# EAGLE board Atomic_V1.0__P-CAD-ASCII.PCB_DipTrace-Export (EAGLE 7.7.0)
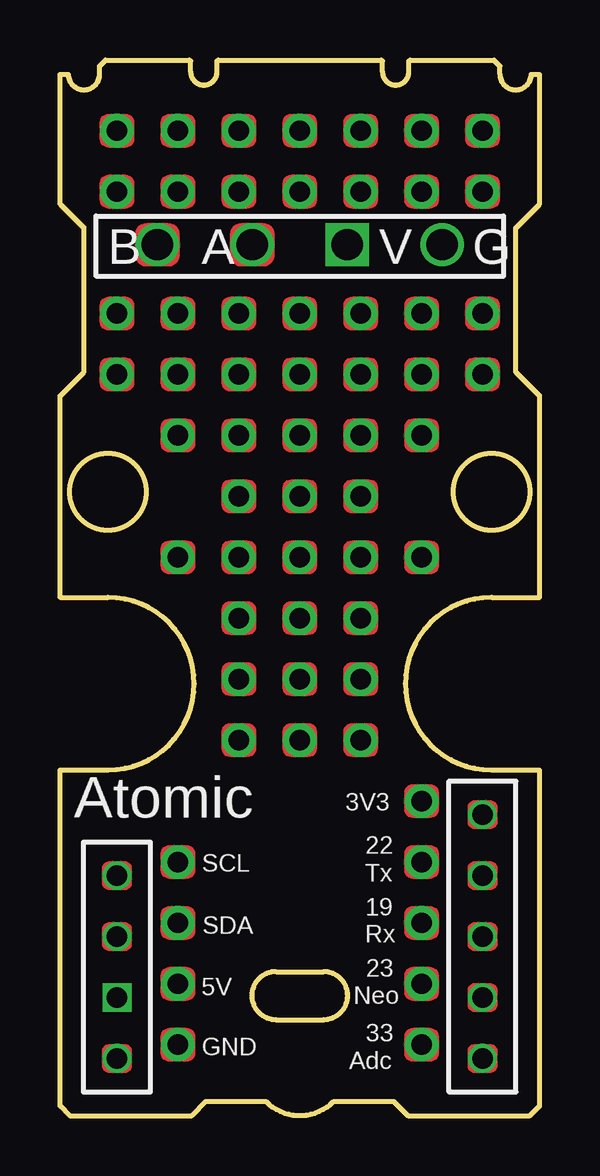
[diagram p0: board, top side]
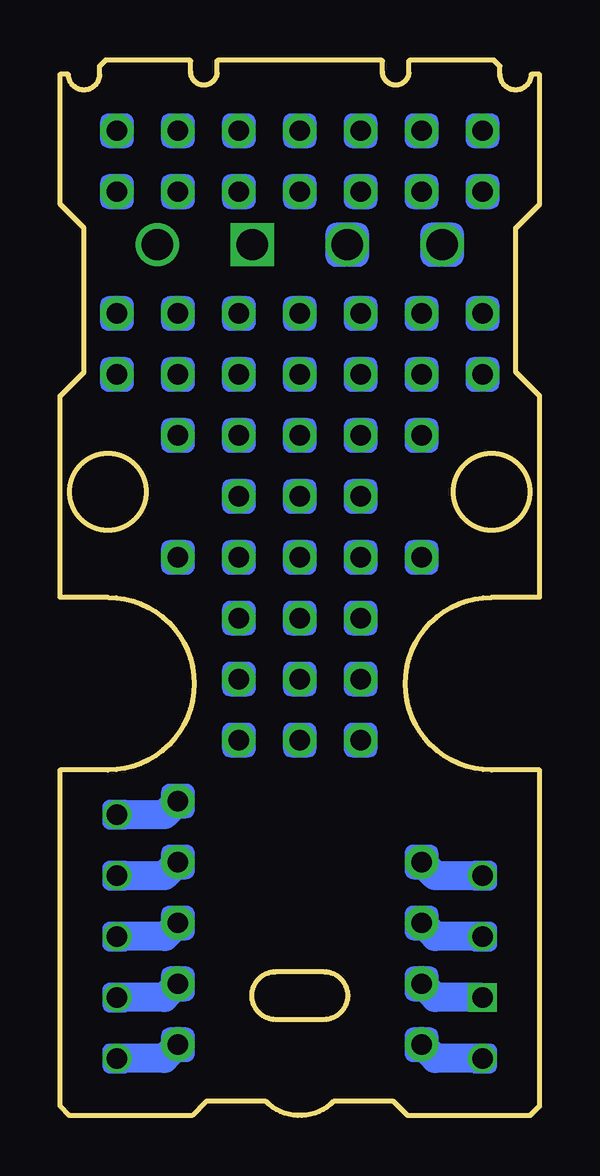
[diagram p1: board, bottom side, seen from below]

Size 20 x 44 mm. Coordinates in mm from the lower left corner, seen from the top.
Outline: 0.35,43.4 arc180 1.65,43.4 1.65,43.75 1.9,44 5.4,44 5.45,43.95 5.45,43.5 arc180 6.55,43.5 6.55,43.95 6.6,44 13.4,44 13.45,43.95 13.45,43.5 arc180 14.55,43.5 14.55,43.95 14.6,44 18.1,44 18.35,43.75 18.35,43.4 arc180 19.65,43.4 20,43.4 20,38 19,37 19,31 20,30 20,21.6 18,21.6 arc180 18,14.4 20,14.4 20,0.4 19.6,0 14.5,0 13.91,0.59 11.41,0.59 arc-90 8.59,0.59 6.09,0.59 5.5,0 0.4,0 0,0.4 0,14.4 2,14.4 arc180 2,21.6 0,21.6 0,30 1,31 1,37 0,38 0,43.4 0.35,43.4
Outline: 11,4 arc180 11,6 9,6 arc180 9,4 11,4
Outline: circle at 2,26 radius 1.6
Outline: circle at 18,26 radius 1.6
Copper layers (1*16): TOP 0.035mm / dielectric 1.5mm / Bottom 0.035mm
Design rules "default *": minimum track width 10mil, minimum drill 0.61mm, track to track 8mil, track to pad 8mil, pad to pad 8mil, via to via 8mil, smd to smd 8mil, copper to edge 40mil, drill to drill 8mil, minimum pad ring 0mil, minimum via ring 8mil, stop-mask expansion 2mil, vias tented up to drill 19mil, thermal gap 10mil
Net classes: 0 Default: width 0.33 mm, clearance 0.33 mm

## Footprints (pad centres in the part's own frame; a part is rotated, then mirrored left to right if it is on the bottom)
FREEPAD = drill 4.2 pad 4.2: 1 0,0
FREEPAD_FREEPAD1 = drill 0.85 pad 1.4: 1 0,0
FREEPAD_FREEPAD10 = drill 2 pad 2: 1 0,0
FREEPAD_FREEPAD11 = drill 0.85 pad 1.2: 1 0,0
FREEPAD_FREEPAD18 = drill 0.85 pad 1.2 square: 1 0,0
FREEPAD_FREEPAD66 = drill 1.3 pad 1.8: 1 0,0
FREEPAD_FREEPAD67 = drill 1.3 pad 1.8: 1 0,0
FREEPAD_FREEPAD69 = drill 1.3 pad 1.8 square: 1 0,0
FREEPAD_FREEPAD74 = drill 0: 1 0,0

## Placement (x,y rotation side)
FREEPAD0  FREEPAD  [FREEPAD]  10,10 0 top
FREEPAD1  FREEPAD  [FREEPAD_FREEPAD1]  4.92,2.95 180 top
FREEPAD2  FREEPAD  [FREEPAD_FREEPAD1]  15.08,2.95 180 top
FREEPAD3  FREEPAD  [FREEPAD_FREEPAD1]  4.92,5.49 180 top
FREEPAD4  FREEPAD  [FREEPAD_FREEPAD1]  15.08,5.49 180 top
FREEPAD5  FREEPAD  [FREEPAD_FREEPAD1]  4.92,8.03 180 top
FREEPAD6  FREEPAD  [FREEPAD_FREEPAD1]  15.08,8.03 180 top
FREEPAD7  FREEPAD  [FREEPAD_FREEPAD1]  4.92,10.57 180 top
FREEPAD8  FREEPAD  [FREEPAD_FREEPAD1]  15.08,10.57 180 top
FREEPAD9  FREEPAD  [FREEPAD_FREEPAD1]  15.08,13.11 180 top
FREEPAD10  FREEPAD  [FREEPAD_FREEPAD10]  10,2 0 top
FREEPAD11  FREEPAD  [FREEPAD_FREEPAD11]  2.38,10 180 top
FREEPAD12  FREEPAD  [FREEPAD_FREEPAD11]  2.38,7.46 180 top
FREEPAD13  FREEPAD  [FREEPAD_FREEPAD11]  17.62,2.38 0 top
FREEPAD14  FREEPAD  [FREEPAD_FREEPAD11]  17.62,4.92 0 top
FREEPAD15  FREEPAD  [FREEPAD_FREEPAD11]  17.62,7.46 0 top
FREEPAD16  FREEPAD  [FREEPAD_FREEPAD11]  17.62,10 0 top
FREEPAD17  FREEPAD  [FREEPAD_FREEPAD11]  17.62,12.54 0 top
FREEPAD18  FREEPAD  [FREEPAD_FREEPAD18]  2.38,4.92 180 top
FREEPAD19  FREEPAD  [FREEPAD_FREEPAD11]  2.38,2.38 180 top
FREEPAD20  FREEPAD  [FREEPAD_FREEPAD1]  7.46,20.73 180 top
FREEPAD21  FREEPAD  [FREEPAD_FREEPAD1]  7.46,18.19 180 top
FREEPAD22  FREEPAD  [FREEPAD_FREEPAD1]  7.46,15.65 0 top
FREEPAD23  FREEPAD  [FREEPAD_FREEPAD1]  4.92,38.51 0 top
FREEPAD24  FREEPAD  [FREEPAD_FREEPAD1]  2.38,38.51 0 top
FREEPAD25  FREEPAD  [FREEPAD_FREEPAD1]  10,15.65 180 top
FREEPAD26  FREEPAD  [FREEPAD_FREEPAD1]  10,38.51 0 top
FREEPAD27  FREEPAD  [FREEPAD_FREEPAD1]  7.46,38.51 0 top
FREEPAD28  FREEPAD  [FREEPAD_FREEPAD1]  10,33.43 0 top
FREEPAD29  FREEPAD  [FREEPAD_FREEPAD1]  7.46,33.43 0 top
FREEPAD30  FREEPAD  [FREEPAD_FREEPAD1]  4.92,33.43 0 top
FREEPAD31  FREEPAD  [FREEPAD_FREEPAD1]  2.38,33.43 0 top
FREEPAD32  FREEPAD  [FREEPAD_FREEPAD1]  10,30.89 0 top
FREEPAD33  FREEPAD  [FREEPAD_FREEPAD1]  7.46,30.89 0 top
FREEPAD34  FREEPAD  [FREEPAD_FREEPAD1]  4.92,30.89 0 top
FREEPAD35  FREEPAD  [FREEPAD_FREEPAD1]  2.38,30.89 0 top
FREEPAD36  FREEPAD  [FREEPAD_FREEPAD1]  10,28.35 0 top
FREEPAD37  FREEPAD  [FREEPAD_FREEPAD1]  7.46,28.35 0 top
FREEPAD38  FREEPAD  [FREEPAD_FREEPAD1]  10,25.81 0 top
FREEPAD39  FREEPAD  [FREEPAD_FREEPAD1]  7.46,25.81 0 top
FREEPAD40  FREEPAD  [FREEPAD_FREEPAD1]  10,23.27 0 top
FREEPAD41  FREEPAD  [FREEPAD_FREEPAD1]  7.46,23.27 0 top
FREEPAD42  FREEPAD  [FREEPAD_FREEPAD1]  10,18.19 0 top
FREEPAD43  FREEPAD  [FREEPAD_FREEPAD1]  10,20.73 0 top
FREEPAD44  FREEPAD  [FREEPAD_FREEPAD1]  7.46,41.05 0 top
FREEPAD45  FREEPAD  [FREEPAD_FREEPAD1]  10,41.05 0 top
FREEPAD46  FREEPAD  [FREEPAD_FREEPAD1]  2.38,41.05 0 top
FREEPAD47  FREEPAD  [FREEPAD_FREEPAD1]  4.92,41.05 0 top
FREEPAD48  FREEPAD  [FREEPAD_FREEPAD1]  12.54,23.27 180 top
FREEPAD49  FREEPAD  [FREEPAD_FREEPAD1]  12.54,25.81 180 top
FREEPAD50  FREEPAD  [FREEPAD_FREEPAD1]  12.54,28.35 180 top
FREEPAD51  FREEPAD  [FREEPAD_FREEPAD1]  17.62,30.89 180 top
FREEPAD52  FREEPAD  [FREEPAD_FREEPAD1]  15.08,30.89 180 top
FREEPAD53  FREEPAD  [FREEPAD_FREEPAD1]  12.54,30.89 180 top
FREEPAD54  FREEPAD  [FREEPAD_FREEPAD1]  17.62,33.43 180 top
FREEPAD55  FREEPAD  [FREEPAD_FREEPAD1]  15.08,33.43 180 top
FREEPAD56  FREEPAD  [FREEPAD_FREEPAD1]  12.54,33.43 180 top
FREEPAD57  FREEPAD  [FREEPAD_FREEPAD1]  12.54,38.51 180 top
FREEPAD58  FREEPAD  [FREEPAD_FREEPAD1]  17.62,38.51 180 top
FREEPAD59  FREEPAD  [FREEPAD_FREEPAD1]  15.08,38.51 180 top
FREEPAD60  FREEPAD  [FREEPAD_FREEPAD1]  12.54,15.65 180 top
FREEPAD61  FREEPAD  [FREEPAD_FREEPAD1]  12.54,18.19 0 top
FREEPAD62  FREEPAD  [FREEPAD_FREEPAD1]  12.54,20.73 0 top
FREEPAD63  FREEPAD  [FREEPAD_FREEPAD1]  15.08,41.05 180 top
FREEPAD64  FREEPAD  [FREEPAD_FREEPAD1]  17.62,41.05 180 top
FREEPAD65  FREEPAD  [FREEPAD_FREEPAD1]  12.54,41.05 180 top
FREEPAD66  FREEPAD  [FREEPAD_FREEPAD66]  15.94,36.3 270 top
FREEPAD67  FREEPAD  [FREEPAD_FREEPAD67]  4.06,36.3 270 top
FREEPAD68  FREEPAD  [FREEPAD_FREEPAD67]  8.02,36.3 270 top
FREEPAD69  FREEPAD  [FREEPAD_FREEPAD69]  11.98,36.3 270 top
FREEPAD70  FREEPAD  [FREEPAD_FREEPAD1]  4.92,28.35 0 top
FREEPAD71  FREEPAD  [FREEPAD_FREEPAD1]  15.08,28.35 0 top
FREEPAD72  FREEPAD  [FREEPAD_FREEPAD1]  4.92,23.27 0 top
FREEPAD73  FREEPAD  [FREEPAD_FREEPAD1]  15.08,23.27 180 top
FREEPAD74  FREEPAD  [FREEPAD_FREEPAD74]  10,2 0 top
FREEPAD75  FREEPAD  [FREEPAD_FREEPAD74]  10,2 180 top

## Library data of the parts
FREEPAD0 FREEPAD1-FREEPAD75 = common

## Tracks (layer width: path | path; a pad name or v marks a point on that pad's centre or on a via)
N$1
  Bottom 1.2: 15.08,13.11 15.65,12.54
N$2
  Bottom 1.2: 15.65,12.54 17.62,12.54
N$3
  Bottom 1.2: 15.08,10.57 15.65,10
N$4
  Bottom 1.2: 15.65,10 17.62,10
N$5
  Bottom 1.2: 15.08,8 15.62,7.46
N$6
  Bottom 1.2: 15.62,7.46 17.62,7.46
N$7
  Bottom 1.2: 15.08,5.49 15.65,4.92
N$8
  Bottom 1.2: 15.65,4.92 17.62,4.92
N$9
  Bottom 1.2: 15.08,2.95 15.65,2.38
N$10
  Bottom 1.2: 15.65,2.38 17.62,2.38
N$11
  Bottom 1.2: 4.35,10 4.92,10.57
N$12
  Bottom 1.2: 2.38,10 4.35,10
N$13
  Bottom 1.2: 4.35,7.46 4.92,8.03
N$14
  Bottom 1.2: 2.38,7.46 4.35,7.46
N$15
  Bottom 1.2: 4.35,4.92 4.92,5.49
N$16
  Bottom 1.2: 2.38,4.92 4.35,4.92
N$17
  Bottom 1.2: 4.35,2.38 4.92,2.95
N$18
  Bottom 1.2: 2.38,2.38 4.35,2.38

## Text on the board
tPlace: B | A | V | G | 3V3 | Atomic | 22 | SCL | Tx | SDA | 19 | Rx | 23 | 5V | Neo | 33 | GND | Adc